# Altium PCB OP_AMP_Single&double.PcbDoc
Units mil, origin at the board's own origin, x right, y up, seen from the top; angles counter-clockwise.
Board outline 3543.31 x 2362.2 mil, 2 copper layers (Top Layer, Bottom Layer); 69 components, 30 nets, 207 pads, 373 vias.
Unrouted connection lines stored in the file: 29.
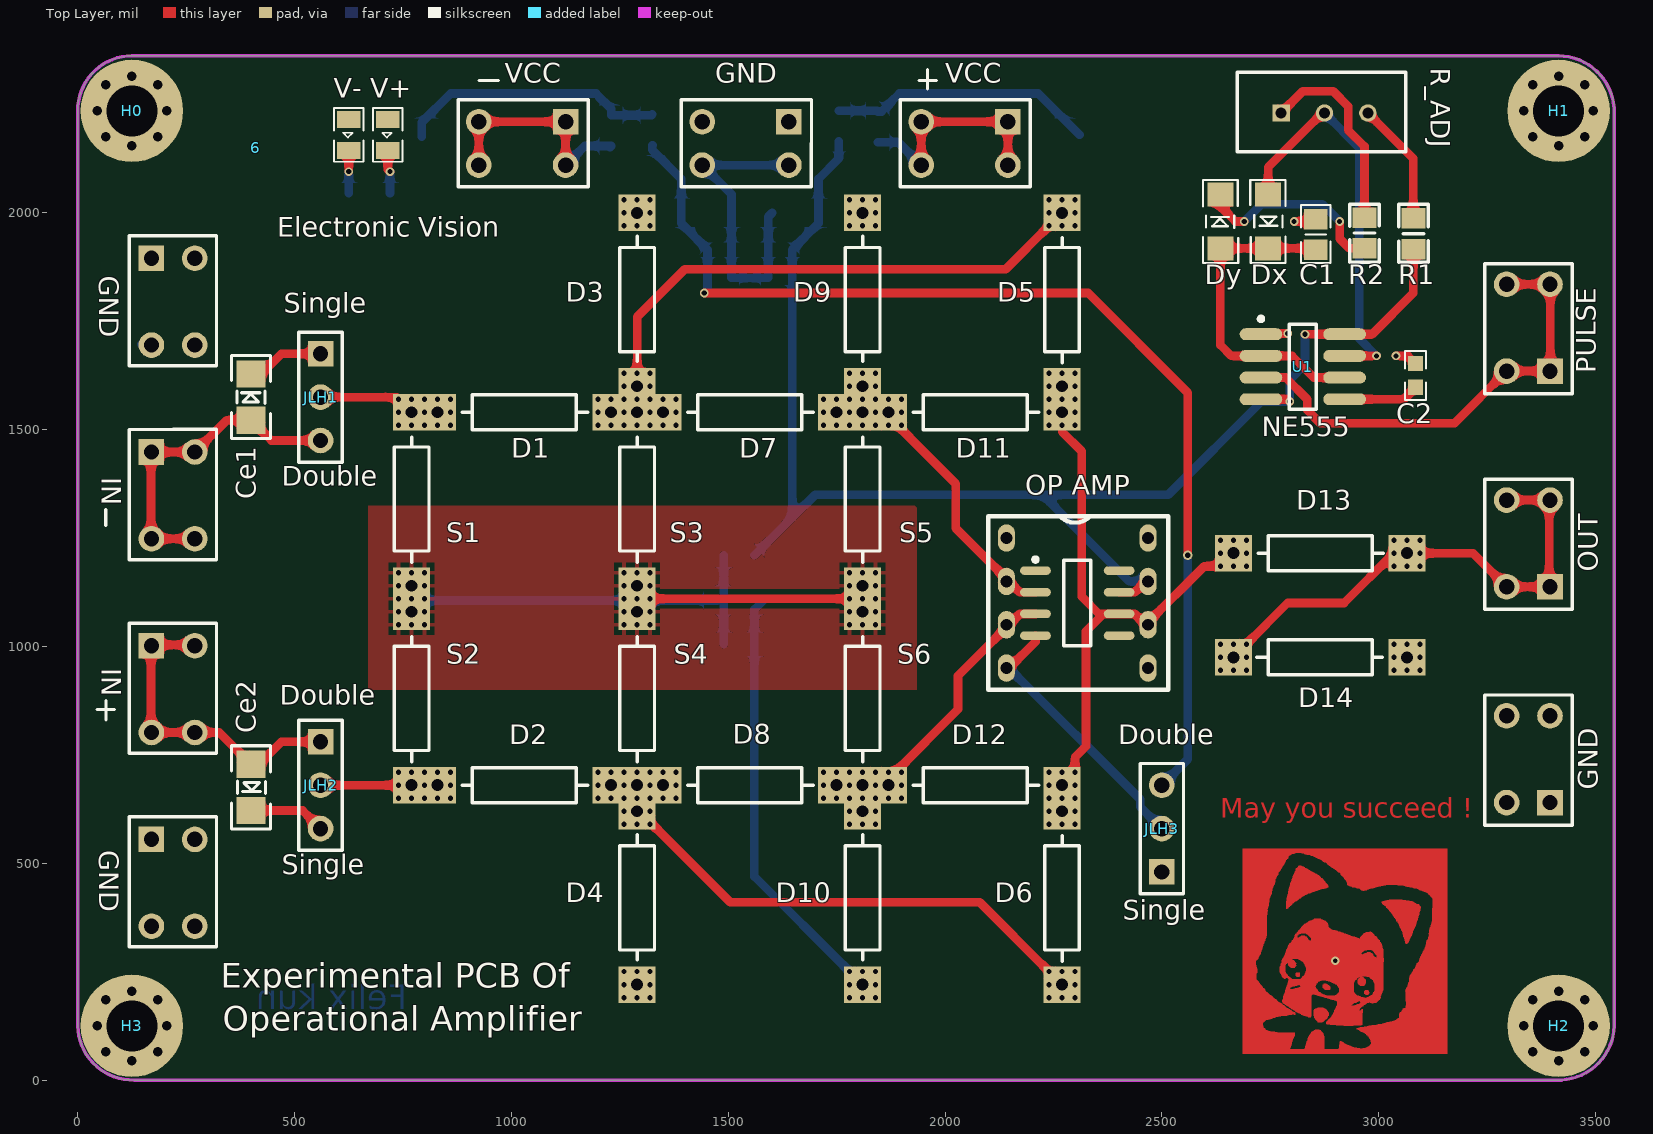
[diagram p0: Top Layer view]
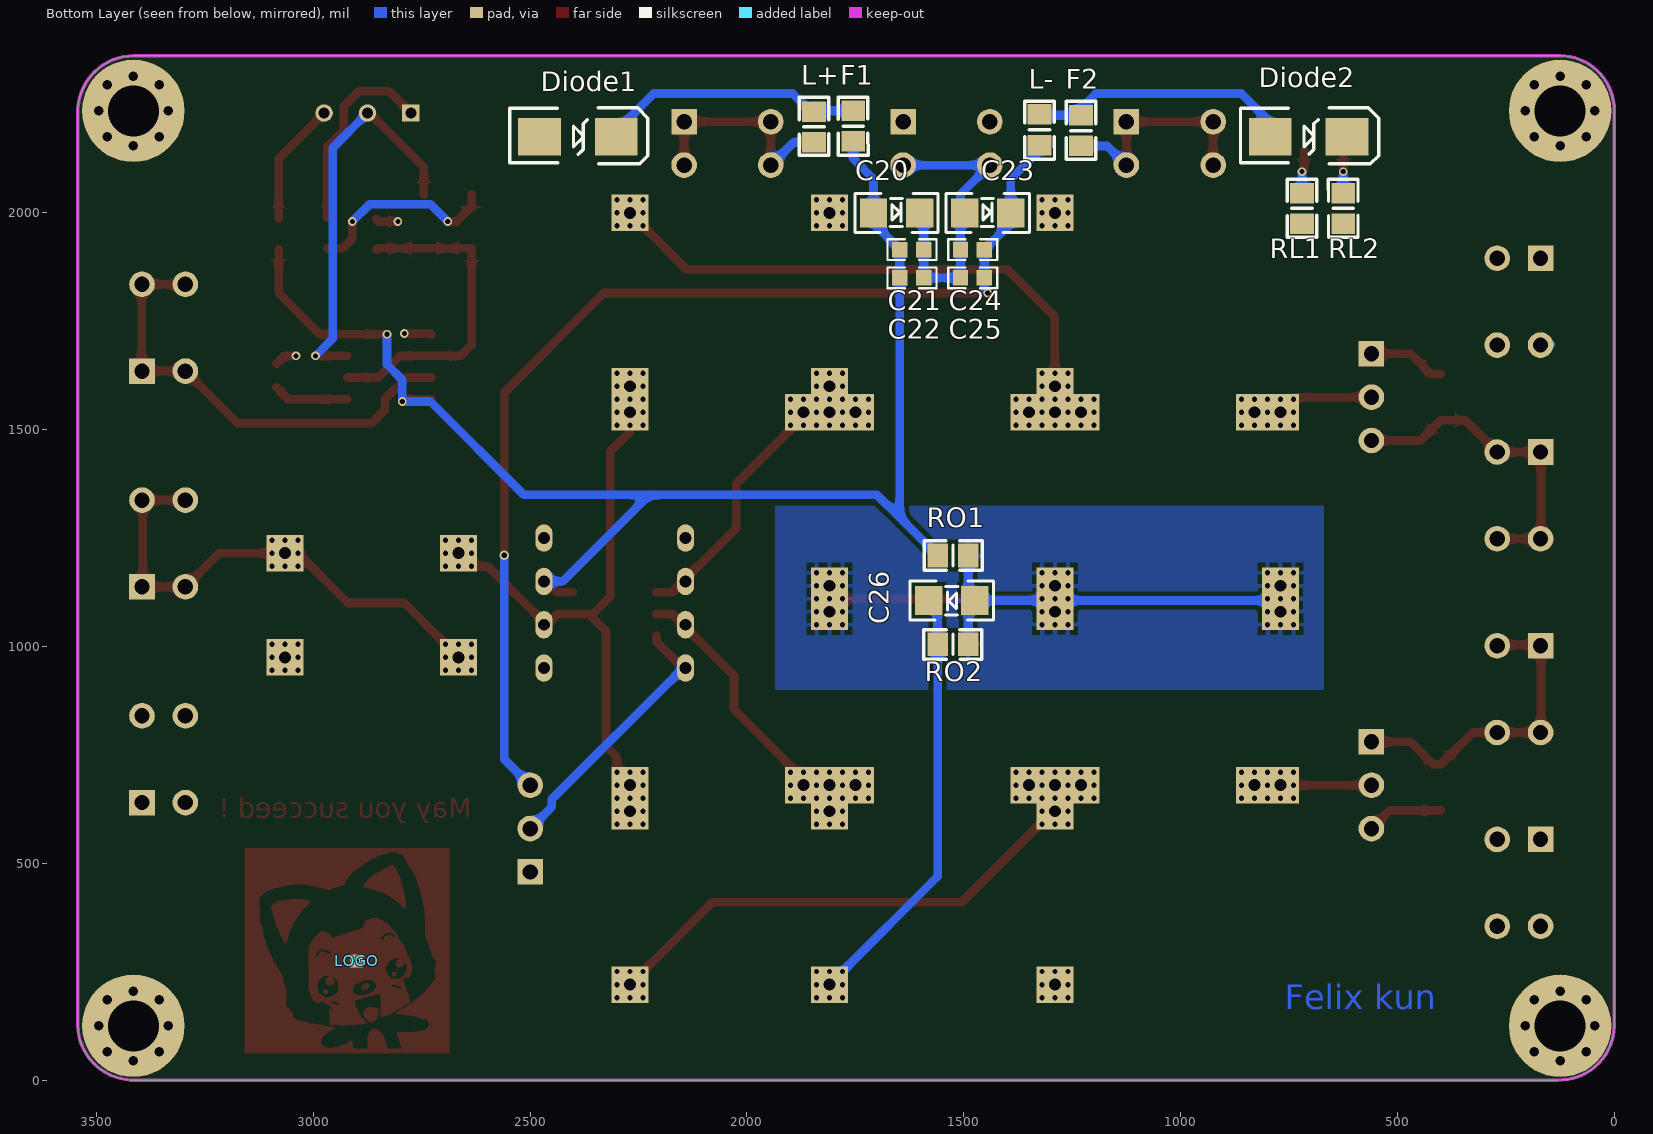
[diagram p1: Bottom Layer view, seen from below]
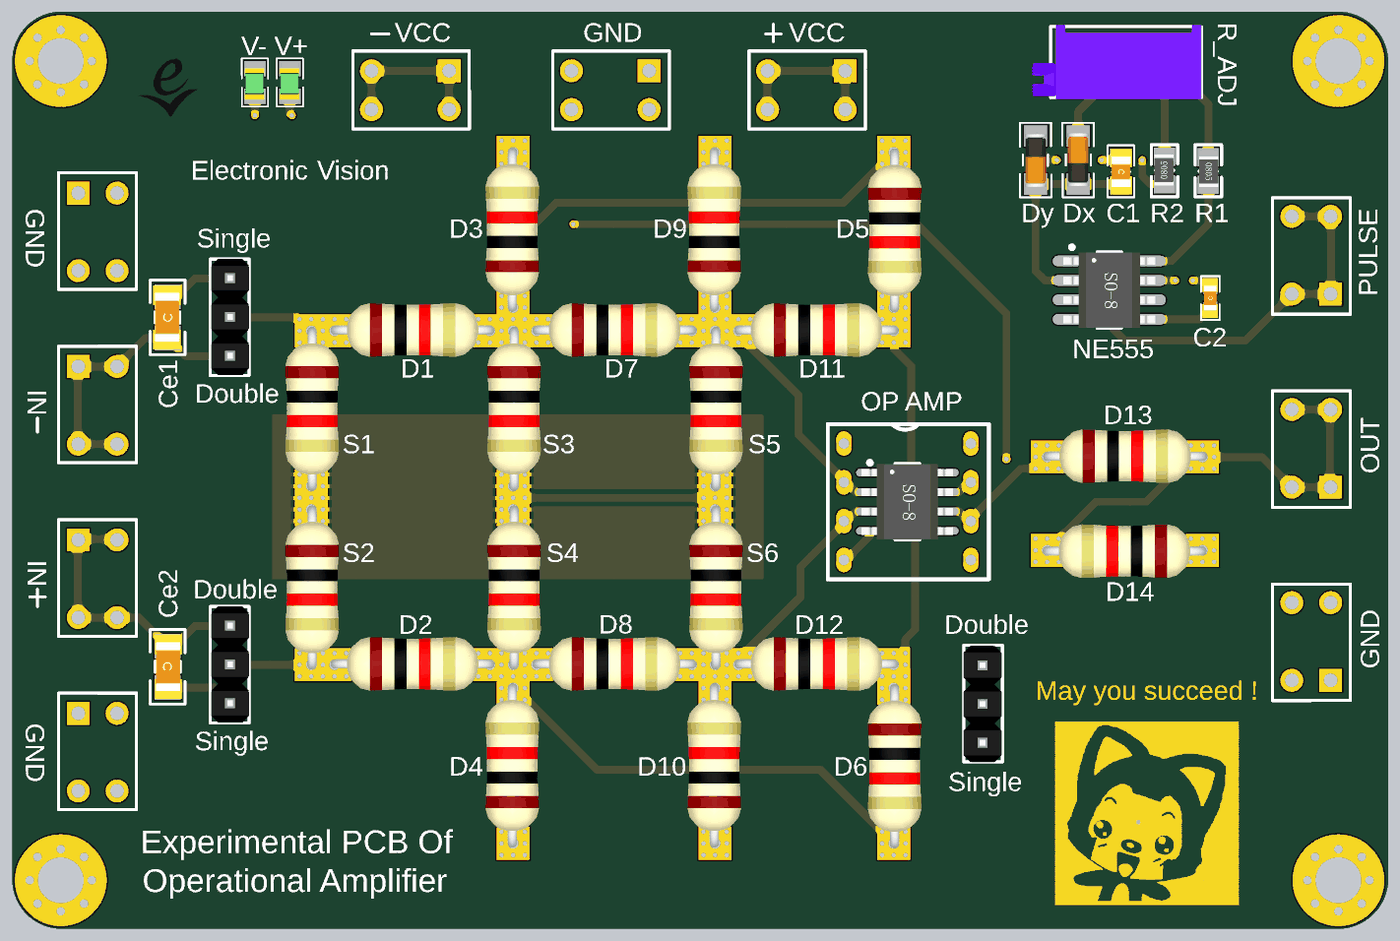
[diagram p2: 3D render of the assembled board from above, using the file's embedded part models]
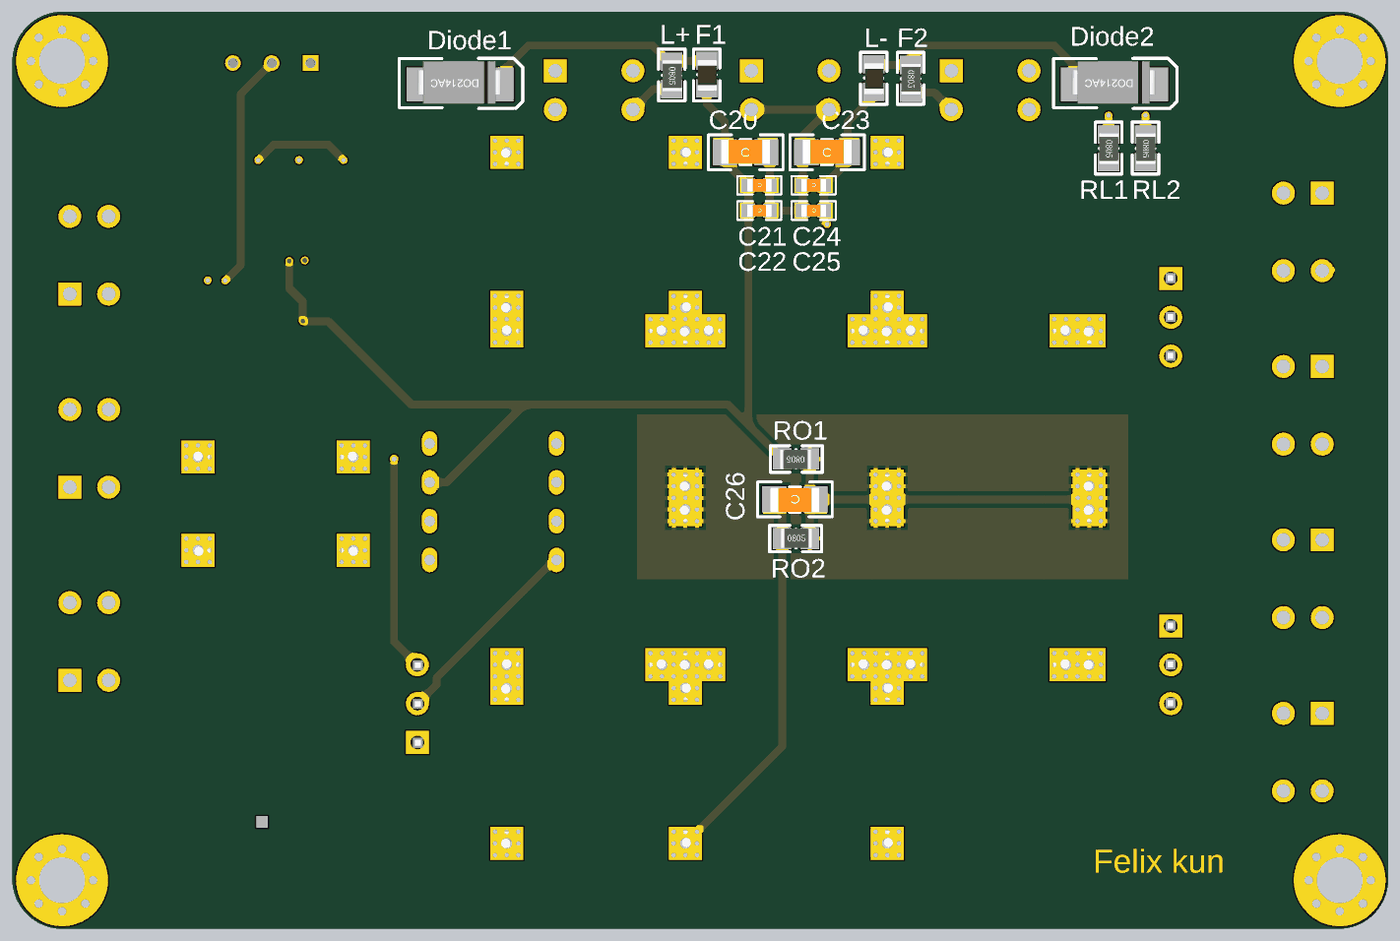
[diagram p3: 3D render of the assembled board from below, using the file's embedded part models]

## Layer stack, top to bottom
Top Solder: solder mask 0.4, Solder Resist, Dk 3.5
Top Layer: signal copper 1.4
Dielectric 1: dielectric 12.6, FR-4, Dk 4.8
Bottom Layer: signal copper 1.4
Bottom Solder: solder mask 0.4, Solder Resist, Dk 3.5

## Board outline
0,125 0,2235 cw(c126.1,2236.1) 125,2362.2 3415,2362.2 cw(c3413.05,2231.95) 3543.31,2230 3543.31,125 cw(c3414.15,129.15) 3410,0 130,0 cw(c127.5,127.5)

## Design rules (kind name [scope] priority, off if disabled: settings)
Clearance Clearance_LOGO [WithinRoom('LOGO') vs WithinRoom('LOGO')] p1: gap=-1
Clearance [All] p2: gap=10
HoleToHoleClearance [All] p1: gap=5 allowstackedmicrovias=TRUE
MinimumSolderMaskSliver [All] p1: minsoldermaskwidth=1
PolygonConnect [All] p1: connectstyle=Relief reliefconductorwidth=10 reliefentries=4 polygonreliefangle="90 Angle" airgapwidth=10
RoomDefinition LOGO [WithinRoom('LOGO')] p1: confinementstyle=ConfineIn formatcopy=TRUE lockcomponents=FALSE outline 2644,574 3189,574 3189,34 2644,34
RoutingVias [All] p1: holewidth=12 width=22 viastyle="Through Hole" minholewidth=7 minwidth=18 maxholewidth=30 maxwidth=80
ShortCircuit ShortCircuit_LOGO [WithinRoom('LOGO')] p1: allowed=TRUE
ShortCircuit [All] p2: allowed=FALSE
SilkToSilkClearance [All] p1: silktosilkclearance=5
SolderMaskExpansion [All] p1: expansion=4
Width [All] p1: maxlimit=50 minlimit=99999 preferedwidth=20 toplayer_minwidth=0 bottomlayer_minwidth=0 minimp=50.000000 maximp=50.000000 favimp=50.000000
26 further rules are at their usual default settings.

## Classes and differential pairs
component class "Components Class 1": LOGO
component class OP_AMP_Single&double: C1 C2 C20 C21 C22 C23 C24 C25 C26 Ce1 Ce2 D1 D2 D3 D4 D5 D6 D7 D8 D9 D10 D11 D12 D13 D14 Diode1 Diode2 Dx Dy F1 F2 GND H0 H1 H2 H3 IN JLH1 JLH2 JLH3 L+ L- LOGO "OP AMP" OUT PULSE R1 R2 R_ADJ RL1 RL2 RO1 RO2 S1 S2 S3 S4 S5 S6 U1 V+ V- VCC

## Components (designator, comment, footprint, x,y, rotation, side; value= is the part's Value field where it differs from the comment)
6 "6" LOGO_EV 410,2150 r0 top
C1 "0603" CAP_0805_20*12 2855,1950 r270 top
C2 "0603" CAP_0603_16*08 3085,1625 r90 top
C20 "Polar" CAP_1206 1655,2000 r180 bottom
C21 "0603" CAP_0603_16*08 1620,1915 r0 bottom
C22 "0603" CAP_0603_16*08 1620,1850 r0 bottom
C23 "Polar" CAP_1206 1445,2000 r180 bottom
C24 "0603" CAP_0603_16*08 1480,1915 r0 bottom
C25 "0603" CAP_0603_16*08 1480,1850 r0 bottom
C26 "Polar" CAP_1206 1528,1106 r0 bottom
Ce1 "Polar" CAP_1206 400,1575 r90 top
Ce2 "Polar" CAP_1206 400,675 r270 top
D1 "RES_Thru-hole" PAD_RES 1030,1540 r0 top
D2 "RES_Thru-hole" PAD_RES 1030,680 r0 top
D3 "RES_Thru-hole" PAD_RES 1290,1800 r90 top
D4 "RES_Thru-hole" PAD_RES 1290,420 r90 top
D5 "RES_Thru-hole" PAD_RES 2270,1800 r270 top
D6 "RES_Thru-hole" PAD_RES 2270,420 r270 top
D7 "RES_Thru-hole" PAD_RES 1550,1540 r0 top
D8 "RES_Thru-hole" PAD_RES 1550,680 r0 top
D9 "RES_Thru-hole" PAD_RES 1810,1800 r90 top
D10 "RES_Thru-hole" PAD_RES 1810,420 r90 top
D11 "RES_Thru-hole" PAD_RES 2070,1540 r0 top
D12 "RES_Thru-hole" PAD_RES 2070,680 r0 top
D13 "RES_Thru-hole" PAD_RES 2865,1215 r0 top
D14 "RES_Thru-hole" PAD_RES 2865,975 r180 top
Diode1 "SS14" SMA 2390,2175 r180 bottom
Diode2 "SS14" SMA 705,2175 r180 bottom
Dx "Diode" Diode1206 2745,1980 r270 top
Dy "Diode" Diode1206 2635,1980 r90 top
F1 "500mA" RES_0805_20*12 1845,2198.12 r270 bottom
F2 "500mA" RES_0805_20*12 1230,2189.57 r270 bottom
GND "U HDR" HEADER_U_1 1540,2210 r180 top
GND "U HDR" HEADER_U_1 3395,740 r90 top (schematic designator GND3)
GND "U HDR" HEADER_U_1 170,455 r270 top (schematic designator GND2)
GND "U HDR" HEADER_U_1 170,1795 r270 top (schematic designator GND1)
H0 "Pad3mm" PAD 125,2235 r0 top
H1 "Pad3mm" PAD 3415,2235 r0 top
H2 "Pad3mm" PAD 3415,125 r0 top
H3 "Pad3mm" PAD 125,125 r0 top
IN "U HDR" HEADER_U_1 170,1348.33 r270 top (schematic designator IN-)
IN "U HDR" HEADER_U_1 170,901.67 r270 top (schematic designator IN+)
JLH1 "Header 3" HEADER1*3_PIN 560,1575 r270 top
JLH2 "Header 3" HEADER1*3_PIN 560,680 r270 top
JLH3 "Header 3" HEADER1*3_PIN 2500,580 r90 top
L+ "Inductor Iron" IND_0805_20*12 1755,2200 r90 bottom
L- "Inductor Iron" IND_0805_20*12 1325,2191.45 r90 bottom
LOGO "LOGO_Felix" ALI_Logo_S 2899,274 r0 top (schematic designator *)
"OP AMP" "Op Amp" SOP8_DOUBLE 2305,1100 r0 top (schematic designator AR1)
OUT "U HDR" HEADER_U_1 3395,1237.5 r90 top
PULSE "U HDR" HEADER_U_1 3395,1735 r90 top (schematic designator Pluse)
R1 "SMD" RES_0805_20*12 3080,1951.42 r270 top
R2 "SMD" RES_0805_20*12 2967.28,1953.31 r90 top
R_ADJ "RES_ADJ" RES_ADJ_H 2875,2230 r0 top (schematic designator R_adj)
RL1 "SMD" RES_0805_20*12 720,2010 r270 bottom
RL2 "SMD" RES_0805_20*12 625,2010 r270 bottom
RO1 "SMD" RES_0805_20*12 1525,1210 r0 bottom
RO2 "SMD" RES_0805_20*12 1525,1005 r180 bottom
S1 "RES_Thru-hole" PAD_RES 770,1340 r270 top
S2 "RES_Thru-hole" PAD_RES 770,880 r270 top
S3 "RES_Thru-hole" PAD_RES 1290,1340 r270 top
S4 "RES_Thru-hole" PAD_RES 1290,880 r270 top
S5 "RES_Thru-hole" PAD_RES 1810,1340 r270 top
S6 "RES_Thru-hole" PAD_RES 1810,880 r270 top
U1 "NE555" SO8_M 2825,1645 r0 top
V+ "Green" LED_0805 715,2179.57 r270 top
V- "Red" LED_0805 625,2179.57 r270 top
VCC "U HDR" HEADER_U_1 1025,2210 r180 top (schematic designator -VCC)
VCC "U HDR" HEADER_U_1 2045,2210 r180 top (schematic designator +VCC)

## Footprints (in the part's own frame and the unit in brackets; to place one, negate y for a bottom-side part, rotate by r counter-clockwise, add the part's x,y. Pads: shape width x height; smd on the part's side, far side on the other; paste and mask are expansions set on the pad)
ALI_Logo_S [mil] "TPAD"
  rect 30x30 smd far side: 1(1,1)
  Top Layer drawing of 1842 lines, arcs and shapes, not listed
CAP_0603_16*08 [mm]
  rect 0.9x0.9 smd: 1(-0.7,0) 2(0.7,0)
  silkscreen extent -1.45,-0.61 1.42,0.61, body extent -1.31,-0.49 1.29,0.51, height 0.89
CAP_0805_20*12 [mm] "Chip Resistor, Body 2.0x1.2mm, IPC Medium Density"
  rect 1.2x1.4 smd: 1(-0.9,0) 2(0.9,0)
  silkscreen extent -1.72,-0.87 1.67,0.86, body extent -1.5,-0.69 1.5,0.71, height 0.93
CAP_1206 [mm] "Chip Capacitor, Body 3.2x1.6mm, IPC High Density"
  rect 1.6x1.7 smd: 1(-1.35,0) 2(1.35,0)
  silkscreen extent -2.44,-1.14 2.44,1.14, body extent -2.1,-0.87 2.1,0.93, height 0.95
Diode1206 [mil] "1N4148"
  rect 55x60 smd: 1(-62,0) 2(62,0)
  silkscreen extent -96,-41 96,40, body extent -70,-29 68,29, height 56
HEADER1*3_PIN [mm]
  rect 1.5x1.5 hole 0.9: 1(-2.54,0)
  round 1.5 hole 0.9: 2(0,0) 3(2.54,0)
  silkscreen extent -3.81,-1.27 3.81,1.27, body extent -3.84,-1.22 3.78,1.28, height 8.54
HEADER_U_1 [mm]
  round 1.5 hole 0.9: 1(-2.54,2.54) 2(2.54,2.54) 2(2.54,0)
  rect 1.5x1.5 hole 0.9: 1(-2.54,0)
  silkscreen extent -3.86,-1.3 3.76,3.81
IND_0805_20*12 [mm] "Chip Inductor, Body 2.0x1.2mm, IPC Medium Density"
  rect 1.2x1.4 smd: 1(-0.9,0) 2(0.9,0)
  silkscreen extent -1.72,-0.87 1.67,0.86, body extent -1.05,-0.65 0.95,0.6, height 0.5
LED_0805 [mm]
  rect 1x1.4 smd: 1(-0.9,0) 2(0.9,0)
  silkscreen extent -1.57,-0.87 1.57,0.86, body extent -0.94,-0.66 1.09,0.61, height 1.1
LOGO_EV [mil]
PAD [mm]
  round 6 hole 3: 0(0,0)
  round 1 hole 0.562: 1(0,2.032) 2(1.524,1.524) 3(2.032,0) 4(1.524,-1.524) 5(0,-2.032) 6(-1.524,-1.524) 7(-2.032,0) 8(-1.524,1.524)
  body extent -3.6,-3.12 3.6,3.12, height 3.33
PAD_RES [mil]
  rect 85x85 hole 27.56: 1(-200,0) 2(200,0)
  silkscreen extent -143,-40 146,40, body extent -210,-67 212,72, height 139
RES_0805_20*12 [mm] "Chip Resistor, Body 2.0x1.2mm, IPC Medium Density"
  rect 1.2x1.4 smd: 1(-0.9,0) 2(0.9,0)
  silkscreen extent -1.72,-0.87 1.67,0.86, body extent -0.97,-0.6 1.03,0.66, height 0.68
RES_ADJ_H [mil]
  rect 40x40 hole 25: 1(-100,0)
  round 40 hole 25: 2(100,0) 3(0,0)
  silkscreen extent -201,-89 187,94, body extent -248,-93 188,97, height 463
SMA [mm] "DO-214-AA/SMA; 2 C-Bend Leads; Body 5.3 x 3.6 mm, inc. leads (LxW)"
  rect 2.5x2.2 smd: 1(-2.25,0) 2(2.25,0)
  silkscreen extent -3.99,-1.57 4.1,1.7, body extent -2.79,-1.27 2.69,1.52, height 2.24
SO8_M [mm] "SOIC, 8-Leads, Body 4.9x3.9mm, Pitch 1.27mm, IPC Low Density"
  oval 2.5x0.7 smd: 1(-2.45,1.905) 2(-2.45,0.635) 3(-2.45,-0.635) 4(-2.45,-1.905) 5(2.45,-1.905) 6(2.45,-0.635) 7(2.45,0.635) 8(2.45,1.905)
  silkscreen extent -2.57,-2.5 0.8,2.93, body extent -3,-2.45 3,2.45, height 1.7
SOP8_DOUBLE [mm]
  oval 1x1.6 hole 0.7: 1(-4.15,3.81) 2(-4.15,1.27) 3(-4.15,-1.27) 4(-4.15,-3.81) 5(4.15,-3.81) 6(4.15,-1.27) 7(4.15,1.27) 8(4.15,3.81)
  oval 1.8x0.5 smd: 1(-2.45,1.905) 2(-2.45,0.635) 3(-2.45,-0.635) 4(-2.45,-1.905) 5(2.45,-1.905) 6(2.45,-0.635) 7(2.45,0.635) 8(2.45,1.905)
  silkscreen extent -5.21,-5.08 5.33,5.08, body extent -3,-2.45 3,2.45, height 1.7

## Part data
6: library part Logo_EV
C1 C2 C21 C22 C24 C25: library part Cap, "Capacitor"
C20 C23 C26 Ce1 Ce2: library part "Cap Pol", "Polarized Capacitor (Axial)"
D1 D2 D3 D4 D5 D6 D7 D8 D9 D10 D11 D12 D13 D14 S1 S2 S3 S4 S5 S6: "Resistor"
Diode1 Diode2: library part "D Schottky", "Schottky Diode"
Dx Dy: "Default Diode"
F1 F2: library part "Fuse 1", "Fuse"
GND GND GND GND IN IN OUT PULSE VCC VCC: library part Header_U
JLH1 JLH2 JLH3: "Header, 3-Pin"
L+ L-: "Magnetic-Core Inductor"
LOGO: "My Logo"
"OP AMP": "FET Operational Amplifier"
R1 R2 RL1 RL2 RO1 RO2: library part RES_SMD, "Resistor"
R_ADJ: "Potentiometer"
V+ V-: library part LED, "Typical RED, GREEN, YELLOW, AMBER GaAs LED"

## Via types
v1: diameter 23.62, hole 11.81, Top Layer to Bottom Layer, 360 vias
v2: diameter 20, hole 12, Top Layer to Bottom Layer, 11 vias
v3: diameter 22, hole 13, Top Layer to Bottom Layer, 1 vias
v4: diameter 20, hole 10, Top Layer to Bottom Layer, 1 vias

## Nets (pads, with @x,y where several pads share a name; then routed paths per layer and width w, separated by ;. In a path a pad name is that pad's centre, name@x,y a point inside that pad or via, vN(x,y) a via of type N, cw(c..) or ccw(c..) an arc to the next point about the centre after c; other vN are vias at no path point)
+VS: "OP AMP.7" C20.1 C21.2 C22.2 L+.1 R1.2 RO1.2 U1.4 U1.8 V+.1 | length 3313.6
  Top Layer w20: 2401.46,1125 2437.48,1125 2462.48,1150 ; U1.4 2790,1570 v2(2795,1565) ; v2(2830,1720) U1.8 2985,1720 3080,1815 R1.2
  Bottom Layer w20: RO1.2 1647.56,1297.13 ; L+.1 1755,2125 1708.15,2078.15 C20.1 1708.15,1975.59 C21.2 C22.2 1647.56,1297.13 ; 2462.48,1150 2425,1150 2225,1350 ; v2(2830,1720) 2830,1650 2795,1615 v2(2795,1565) 2730,1565 2515,1350 2225,1350 ; 1647.56,1297.13 1700.43,1350 2225,1350
-VS: C23.2 C24.1 C25.1 JLH3.3 L-.1 V-.1 | length 2526.9
  Top Layer w20: v2(1445,1815) 2330,1815 2560,1585 v3(2560,1210)
  Bottom Layer w20: L-.1@1325.43,2156.02 L-.1 1325,2145 1391.85,2078.15 C23.2 1391.85,1975.59 C24.1 C25.1 1452.44,1822.44 ; JLH3.3 2560,740 v3(2560,1210)
CHOOSE: "OP AMP.4" JLH3.2 | length 616.3
  Top Layer w20: 2147.52,950 2208.54,1011.02 2208.54,1025
  Bottom Layer w20: 2147.52,950 2450,647.52 2450,630 JLH3.2
GND_OP: C1.1 C2.2 C20.2 C21.1 C22.1 C23.1 C24.2 C25.2 C26.2 D3.2 D4.1 D9.2 D10.1 D14.1 Diode1.1 Diode2.2 GND.1 GND.2 JLH3.1 RL1.2 RL2.2 RO2.1 U1.1 | length 2198.5
  Top Layer w20: GND.2@169,1697 GND.2@172,1697 ; v1(1320,2000) v1(1290,2000) v1(1320,2030) ; v1(1780,2000) v1(1810,2000) ; U1.1 2730,1721.46 v2(2790,1721.46) ; v2(2805,1980) 2849.57,1980 C1.1 ; v2(3040,1670) 3067.56,1670 C2.2
  Bottom Layer w20: GND.2@147,1697 GND.2@169,1697 ; v1(1260,220) v1(1290,220) v1(1320,220) ; C26.2 1560.43,1085.28 RO2.1 1560.43,469.57 v1(1780,250) v1(1810,220) ; C20.2 1592.44,1990.59 C21.1 C22.1 C25.2 C24.2 1507.56,2042.44 1440,2110 GND.1@1640,2110 ; v1(1780,220) v1(1810,220) ; v1(1840,250) v1(1810,220) ; D14.1@3065,970 v1(3065,975) v1(3095,1005)
  other v1: 1260,190 1290,190 1320,190 1780,190 1810,190 1840,190 1840,220 1260,250 1290,250 1320,250 1810,250 3035,945 3065,945 3095,945 3035,975 3095,975 3035,1005 3065,1005 1260,1970 1290,1970 1320,1970 1780,1970 1810,1970 1840,1970 1260,2000 1840,2000 1260,2030 1290,2030 1780,2030 1810,2030 1840,2030
Net+VCC_1: F1.2 VCC.1@2145,2110 VCC.1@2145,2210 VCC.2@1945,2110 VCC.2@1945,2210 | length 521.8
  Top Layer w20: VCC.2@1945,2110 1945,2210 2145,2210 VCC.1@2145,2110
  Bottom Layer w20: F1.2 1892.32,2162.68 VCC.2@1945,2110
Net-VCC_1: F2.2 VCC.1@1125,2110 VCC.1@1125,2210 VCC.2@925,2110 VCC.2@925,2210 | length 527.1
  Top Layer w20: VCC.2@925,2110 925,2210 1125,2210 VCC.1@1125,2110
  Bottom Layer w20: VCC.1@1125,2110 1169.13,2154.13 F2.2 F2.2@1227.32,2151.45
NetAR1_2: "OP AMP.2" D7.2 D9.1 D11.1 S5.1 | length 648
  Top Layer w20: v1(1810,1540) v1(1810,1510) 1890,1510 2025,1375 2025,1272.52 2172.52,1125 2208.54,1125
  other v1: 1720,1510 1750,1510 1780,1510 1780,1510 1840,1510 1840,1510 1870,1510 1900,1510 1720,1540 1750,1540 1780,1540 1780,1540 1840,1540 1840,1540 1870,1540 1900,1540 1720,1570 1750,1570 1780,1570 1780,1570 1780,1570 1810,1570 1810,1570 1840,1570 1840,1570 1840,1570 1870,1570 1900,1570 1780,1600 1810,1600 1840,1600 1780,1630 1810,1630 1840,1630
NetAR1_3: "OP AMP.3" D8.2 D10.2 D12.1 S6.2 | length 625.1
  Top Layer w20: v1(1810,680) v1(1810,710) 1885,710 2030,855 2030,932.48 2172.52,1075 2208.54,1075
  other v1: 1780,590 1810,590 1840,590 1780,620 1810,620 1840,620 1720,650 1750,650 1780,650 1780,650 1780,650 1810,650 1810,650 1840,650 1840,650 1840,650 1870,650 1900,650 1720,680 1750,680 1780,680 1780,680 1840,680 1840,680 1870,680 1900,680 1720,710 1750,710 1780,710 1780,710 1840,710 1840,710 1870,710 1900,710
NetAR1_6: "OP AMP.6" D5.2 D6.1 D11.2 D12.2 D13.1 | length 1340.8
  Top Layer w20: v1(2270,680) v1(2300,710) 2300,745 2325,770 2325,1035 2365,1075 ; v1(2270,1570) v1(2270,1540) v1(2270,1510) 2270,1495 2315,1450 2315,1115 2355,1075 2365,1075 ; v1(2665,1185) v1(2635,1185) 2597.48,1185 2462.48,1050 2437.48,1075 2401.46,1075 2365,1075
  other v1: 2240,590 2270,590 2300,590 2240,620 2270,620 2300,620 2240,650 2240,650 2270,650 2270,650 2300,650 2300,650 2240,680 2300,680 2240,710 2270,710 2695,1185 2635,1215 2665,1215 2695,1215 2635,1245 2665,1245 2695,1245 2240,1510 2300,1510 2240,1540 2300,1540 2240,1570 2240,1570 2270,1570 2300,1570 2300,1570 2240,1600 2270,1600 2300,1600 2240,1630 2270,1630 2300,1630
NetC1_2: C1.2 Dx.2 Dy.1 U1.2 U1.6 | length 761.9
  Top Layer w20: C1.2 2851.57,1918 Dx.2 Dy.1 2635,1695 2660,1670 U1.2 2800,1670 2850,1620 U1.6
NetC2_1: C2.1 U1.5 | length 174.9
  Top Layer w20: U1.5 3057.56,1570 C2.1
NetCe1_1: Ce1.1 IN.1@170,1448.33 IN.1@270,1448.33 IN.2@170,1248.33 IN.2@270,1248.33 JLH1.3 | length 740.7
  Top Layer w20: IN.2@270,1248.33 171,1248.33 169,1250.33 169,1448.33 170,1448.33 270,1448.33 343.52,1521.85 Ce1.1 446.85,1475 JLH1.3
NetCe1_2: Ce1.2 JLH1.1 | length 179.4
  Top Layer w20: Ce1.2 423.15,1628.15 470,1675 JLH1.1
NetCe2_1: Ce2.1 IN.1@170,1001.67 IN.1@270,1001.67 IN.2@170,801.67 IN.2@270,801.67 JLH2.1 | length 745.6
  Top Layer w20: IN.1@270,1001.67 268,1003.67 169,1003.67 169,803.67 171,801.67 270,801.67 326.48,801.67 Ce2.1 418.15,728.15 470,780 JLH2.1
NetCe2_2: Ce2.2 JLH2.3 | length 177.3
  Top Layer w20: Ce2.2 518.15,621.85 JLH2.3
NetD1_1: D1.1 JLH1.2 S1.1 | length 224.5
  Top Layer w20: JLH1.2 735,1575 v1(740,1570) v1(770,1540)
  other v1: 740,1510 770,1510 800,1510 800,1510 830,1510 860,1510 740,1540 800,1540 800,1540 830,1540 860,1540 770,1570 800,1570 800,1570 830,1570 860,1570
NetD1_2: D1.2 D3.1 D5.1 D7.1 S3.1 | length 1299.4
  Top Layer w20: v1(1290,1540) 1290,1760 1400,1870 2140,1870 v1(2240,1970) v1(2270,2000)
  other v1: 1200,1510 1230,1510 1260,1510 1260,1510 1290,1510 1320,1510 1320,1510 1350,1510 1380,1510 1200,1540 1230,1540 1260,1540 1260,1540 1320,1540 1320,1540 1350,1540 1380,1540 1200,1570 1230,1570 1260,1570 1260,1570 1260,1570 1290,1570 1290,1570 1320,1570 1320,1570 1320,1570 1350,1570 1380,1570 1260,1600 1290,1600 1320,1600 1260,1630 1290,1630 1320,1630 2270,1970 2300,1970 2240,2000 2300,2000 2240,2030 2270,2030 2300,2030
NetD2_1: D2.1 JLH2.2 S2.2 | length 210
  Top Layer w20: JLH2.2 v1(740,680) v1(770,680)
  other v1: 740,650 770,650 800,650 800,650 830,650 860,650 800,680 800,680 830,680 860,680 740,710 770,710 800,710 800,710 830,710 860,710
NetD2_2: D2.2 D4.2 D6.2 D8.1 S4.2 | length 1145.7
  Top Layer w20: v1(1290,620) 1295,620 1505,410 2080,410 v1(2240,250) v1(2270,220)
  other v1: 2240,190 2270,190 2300,190 2240,220 2300,220 2270,250 2300,250 1260,590 1290,590 1320,590 1260,620 1320,620 1200,650 1230,650 1260,650 1260,650 1260,650 1290,650 1290,650 1320,650 1320,650 1320,650 1350,650 1380,650 1200,680 1230,680 1260,680 1260,680 1290,680 1320,680 1320,680 1350,680 1380,680 1200,710 1230,710 1260,710 1260,710 1290,710 1320,710 1320,710 1350,710 1380,710
NetD13_2: D13.2 D14.2 OUT.1 OUT.2 | length 1162.8
  Top Layer w20: v1(2665,975) v1(2695,1005) 2790,1100 2920,1100 v1(3035,1215) v1(3065,1215) v1(3095,1215) 3217.5,1215 3295,1137.5 OUT.1@3394,1137.5 ; OUT.2@3295,1337.5 OUT.2@3395,1337.5 ; OUT.2@3393,1335.5 3393,1138.5 OUT.1@3394,1137.5 ; OUT.1@3395,1137.5 OUT.1@3394,1137.5 ; OUT.1@3396,1135.5 OUT.1@3394,1137.5
  other v1: 2635,945 2665,945 2695,945 2635,975 2695,975 2635,1005 2665,1005 3035,1185 3065,1185 3095,1185 3035,1245 3065,1245 3095,1245
NetDiode1_2: Diode1.2 F1.1 L+.2 | length 612.3
  Bottom Layer w20: L+.2 1843.12,2235.43 F1.1 1853.55,2233.55 1895,2275 2215,2275 Diode1.2@2310,2180
NetDiode2_1: Diode2.1 F2.1 L-.2 | length 622.8
  Bottom Layer w20: Diode2.1 793.58,2208.58 860,2275 1195,2275 1230,2240 F2.1 1323.12,2225 L-.2
NetDx_1: Dx.1 R_ADJ.3 U1.7 | length 928
  Top Layer w20: Dx.1 2745,2105 2870,2230 R_ADJ.3 ; U1.7 v2(2995,1670)
  Bottom Layer w20: R_ADJ.3 2955,2150 2955,1710 v2(2995,1670)
NetDy_2: Dy.2 R2.1 | length 456.1
  Top Layer w20: Dy.2 2635,2015 2670,1980 v2(2690,1980) ; v2(2910,1980) 2910,1940 2932.13,1917.87 R2.1
  Bottom Layer w20: v2(2690,1980) 2730,2020 2870,2020 v2(2910,1980)
NetPluse_1: PULSE.1 PULSE.2 U1.3 | length 1076.1
  Top Layer w20: U1.3 2785,1620 2835,1570 2835,1545 2865,1515 3175,1515 3295,1635 PULSE.1@3395,1635 ; PULSE.2@3295,1835 3394,1835 3396,1833 PULSE.1@3396,1633
NetR1_1: R1.1 R_ADJ.2 | length 286.6
  Top Layer w20: R_ADJ.2 3080,2125 R1.1
NetR2_2: R2.2 R_ADJ.1 | length 461.9
  Top Layer w20: R_ADJ.1 2825,2280 2895,2280 2930,2245 2930,2231.25 2930,2203.75 2930,2190 2967.27,2152.73 R2.2
NetRL1_1: RL1.1 V+.2 | length 100.8
  Top Layer w20: V+.2 715,2100 v2(720,2095)
  Bottom Layer w20: RL1.1 v2(720,2095)
NetRL2_1: RL2.1 V-.2 | length 98.7
  Top Layer w20: v2(625,2095) V-.2
  Bottom Layer w20: RL2.1 v2(625,2095)
VS/2: C26.1 RO1.1 RO2.2 S1.2 S2.1 S3.2 S4.1 S5.2 S6.1 | length 1417.9
  Top Layer w20: v1(1290,1110) v1(1320,1110) v1(1780,1110) v1(1810,1110)
  Bottom Layer w20: v1(770,1110) S2.1@774,1106 ; S2.1@800,1106 S4.1@1290,1106 ; S4.1@1320,1106 C26.1 ; RO2.2 RO1.1 ; v1(1780,1110) v1(1810,1140)
  other v1: 740,1050 770,1050 800,1050 1260,1050 1290,1050 1320,1050 1780,1050 1810,1050 1840,1050 740,1080 770,1080 800,1080 1260,1080 1290,1080 1320,1080 1780,1080 1810,1080 1840,1080 740,1110 740,1110 770,1110 800,1110 800,1110 1260,1110 1260,1110 1290,1110 1320,1110 1780,1110 1810,1110 1840,1110 1840,1110 740,1140 770,1140 800,1140 1260,1140 1290,1140 1320,1140 1780,1140 1840,1140 740,1170 770,1170 800,1170 1260,1170 1290,1170 1320,1170 1780,1170 1810,1170 1840,1170
pads on no net: "OP AMP.1" "OP AMP.5" "OP AMP.8" H0.0 H0.1 H0.2 H0.3 H0.4 H0.5 H0.6 H0.7 H0.8 H1.0 H1.1 H1.2 H1.3 H1.4 H1.5 H1.6 H1.7 H1.8 H2.0 H2.1 H2.2 H2.3 H2.4 H2.5 H2.6 H2.7 H2.8 H3.0 H3.1 H3.2 H3.3 H3.4 H3.5 H3.6 H3.7 H3.8 LOGO.1
copper on no net:
  other v4: 2900,275

## Polygon pours and split planes (outlines as drawn)
VS/2 on Top Layer "Bottom Layer-No Net" (solid, remove dead copper, pour order 4): 670,1325 1930,1325 1935,1320 1935,900 670,900
VS/2 on Bottom Layer "Bottom Layer-No Net" (solid, remove dead copper, pour order 6): 670,1325 1935,1325 1935,900 670,900

## Keep-outs
Keep-Out Layer:
  the board outline again, w8

## Other copper
Top Layer:
  text "May you succeed !" at 2635,590 h78
Bottom Layer:
  text "Felix kun" at 760,145 h96

## Silkscreen, mask and mechanical layers (free items; w line width, h text height)
Top Overlay:
  lines w7: 45,855 85,855 ; 65,830 65,875 ; 925,2305 970,2305 ; 1940,2305 1980,2305 ; 1960,2285 1960,2330
  lines w8: 65,1280 65,1315
  text "Electronic" at 460,1930 h78
  text "Vision" at 785,1930 h78
  text "Single" at 475,1755 h78
  text "NE555" at 2730,1470 h78
  text "Double" at 470,1355 h78
  text "Double" at 465.85,850.83 h78
  text "Double" at 2400,760 h78
  text "Single" at 470,460 h78
  text "Single" at 2410,355 h78
  text "Experimental PCB Of" at 330,195 h96
  text "Operational Amplifier" at 335,95 h96
Top Solder:
  text "May you succeed !" at 2635,590 h78
Bottom Solder:
  text "Felix kun" at 760,145 h96